# EAGLE board esp32Stack (EAGLE 7.7.0)
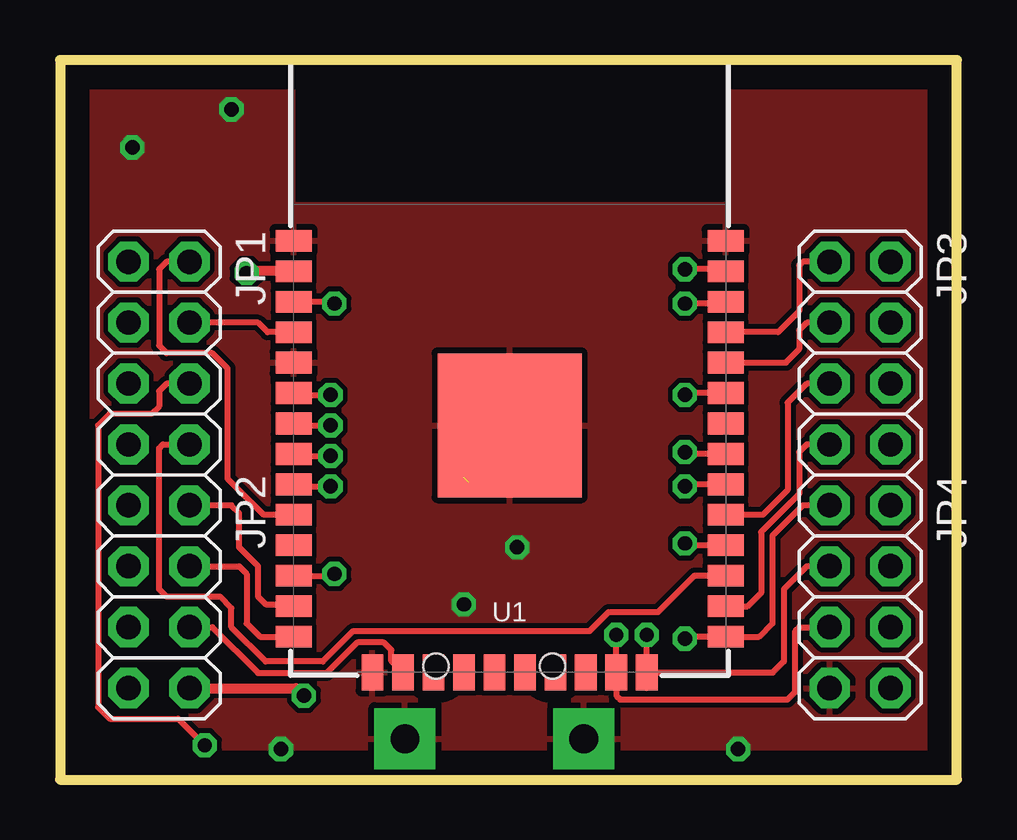
[diagram p0: board, top side]
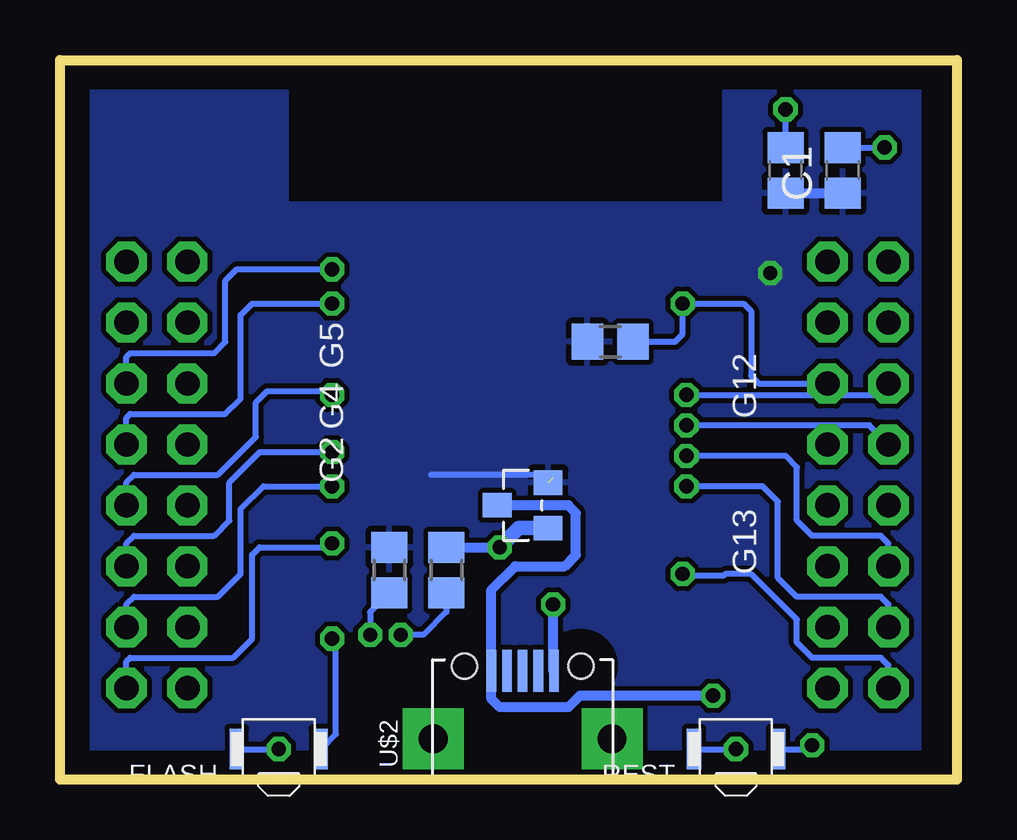
[diagram p1: board, bottom side, seen from below]

Size 37.37 x 30 mm. Coordinates in mm from the lower left corner, seen from the top.
Outline: 0,0 37.37,0 37.37,30 0,30 0,0
Copper layers (1*16): Top 0.035mm / dielectric 1.5mm / Bottom 0.035mm
Design rules "default": minimum track width 10mil, minimum drill 24mil, track to track 8mil, track to pad 8mil, pad to pad 8mil, via to via 8mil, smd to smd 8mil, copper to edge 40mil, drill to drill 8mil, minimum pad ring 10mil, minimum via ring 8mil, stop-mask expansion 4mil, vias tented up to drill 0mil, thermal gap 10mil

## Footprints (pad centres in the part's own frame; a part is rotated, then mirrored left to right if it is on the bottom)
C0805 = smd 1.3 x 1.5: 1 -0.95,0; 2 0.95,0
B3U-3000P(M) = smd 0.6 x 1.7: 1 -1.75,0; 2 1.75,0
SOT-23 = smd 1.016 x 1.2: 1 -0.95,-1.06; 2 0.95,-1.06; 3 0,1.06
2X04 = drill 1.016 pad 1.676 octagon: 1 -3.81,-1.27; 2 -3.81,1.27; 3 -1.27,-1.27; 4 -1.27,1.27; 5 1.27,-1.27; 6 1.27,1.27; 7 3.81,-1.27; 8 3.81,1.27
R0805 = smd 1.3 x 1.5: 1 -0.95,0; 2 0.95,0
ESP-WROOM-03 = smd 0.9 x 1.5: 1 7.7,9; 2 6.43,9; 3 5.16,9; 4 3.89,9; 5 2.62,9; 6 1.35,9; 7 0.08,9; 8 -1.19,9; 9 -2.46,9; 10 -3.73,9; 11 -5,9; 12 -6.27,9; 13 -7.54,9; 14 -8.81,9; 25 -8.81,-9; 26 -7.54,-9; 27 -6.27,-9; 28 -5,-9; 29 -3.73,-9; 30 -2.46,-9; 31 -1.19,-9; 32 0.08,-9; 33 1.35,-9; 34 2.62,-9; 35 3.89,-9; 36 5.16,-9; 37 6.43,-9; 38 7.7,-9 | smd 1.5 x 0.9: 15 -10.3,5.715; 16 -10.3,4.445; 17 -10.3,3.175; 18 -10.3,1.905; 19 -10.3,0.635; 20 -10.3,-0.635; 21 -10.3,-1.905; 22 -10.3,-3.175; 23 -10.3,-4.445; 24 -10.3,-5.715 | smd 6 x 6: GND 0,0
MICRO-USB = smd 0.4 x 1.75: 1 -1.3,4.525; 2 -0.65,4.525; 3 0,4.525; 4 0.65,4.525; 5 1.3,4.525 | drill 1.2 pad 2.54 square: GND1 -3.725,1.7; GND2 3.725,1.7 | hole 1.05: -2.425,4.73; 2.425,4.73

## Placement (x,y rotation side)
C1  100u  [C0805]  4.76,25.4 90 bottom
C2  10u  [C0805]  7.14,25.4 90 bottom
FLASH  SPST.B3U-3000P(M)  [B3U-3000P(M)]  28.26,1.27 180 bottom
GND  MCP1700SOT23  [SOT-23]  18.1,11.43 90 bottom
JP1  [2X04]  4.13,17.78 270 top
JP2  [2X04]  4.13,7.62 270 top
JP3  [2X04]  33.34,17.78 270 top
JP4  [2X04]  33.34,7.62 270 top
R2  10k  [R0805]  14.45,18.26 180 bottom
R3  10k  [R0805]  23.65,8.73 90 bottom
R5  10k  [R0805]  21.27,8.73 270 bottom
REST  SPST.B3U-3000P(M)  [B3U-3000P(M)]  9.21,1.27 180 bottom
U1  ESP-WROOM-03  [ESP-WROOM-03]  18.73,14.76 90 top
U$2  MICRO-USB  [MICRO-USB]  18.1,0 0 bottom

## Library data of the parts
C1 C2 = eagle-ltspice; SPICEMODEL: NONE; SPICEPREFIX: C
FLASH REST = omron
GND = MCP1700
JP1-JP4 = adafruit
R2 R3 R5 = eagle-ltspice; SPICEMODEL: NONE; SPICEPREFIX: R
U1 = esp32
U$2 = microusb (1)

## Nets
3V3: C1.1 C2.1 GND.2 R2.2 R3.2 U1.2
+5V: GND.3 JP2.8 U$2.1
ADC: JP1.4 U1.4
EN: JP1.6 R2.1 REST.1 U1.3
GND: C1.2 C2.2 FLASH.2 GND.1 JP4.7 R5.1 REST.2 U1.1 U1.5 U1.15 U1.38 U1.GND U$2.5 U$2.GND1 U$2.GND2
GPIO0: FLASH.1 JP4.1 U1.25
GPIO2: JP4.3 R3.1 U1.24
GPIO4: JP3.7 U1.26
GPIO5: JP3.5 U1.29
GPIO12: JP2.4 U1.14
GPIO13: JP2.6 U1.16
GPIO14: JP2.2 U1.13
GPIO15: JP4.5 R5.2 U1.23
GPIO16: JP1.8 U1.27
GPIO17: JP4.8 U1.28
GPIO18: JP4.6 U1.30
GPIO19: JP4.4 U1.31
GPIO21: JP4.2 U1.33
GPIO22: JP3.8 U1.36
GPIO23: JP3.6 U1.37
GPIO25: JP1.2 U1.10
GPIO27: JP2.7 U1.12
GPIO32: JP2.3 U1.8
GPIO33: JP2.5 U1.9
GPIO34: JP1.5 U1.6
GPIO35: JP1.7 U1.7
RXD: JP3.3 U1.34
TXD: JP3.1 U1.35

## Tracks (layer width: path | path; a pad name or v marks a point on that pad's centre or on a via)
3V3  (via drill 0.6)  (1 unrouted)
  Top 0.406: U1.2 7.86,21.19 v7.78,21.11
  Bottom 0.254: GND.2 17.36,12.7 21.91,12.7
  Bottom 0.406: C2.1 C1.1 | 16.83,12.59 16.72,12.59
  pour Bottom: 1.59,30.48 9.68,30.48 9.68,23.97 27.94,23.97 27.94,30 36.99,30 36.99,0 1.59,0
+5V  (via drill 0.6)
  Top 0.406: JP2.8 9.84,3.81 v10.16,3.49
  Bottom 0.406: GND.3 16.19,11.43 15.88,11.11 15.88,9.37 16.35,8.89 18.42,8.89 19.4,7.91 U$2.1 19.4,3.36 19.05,3.02 16.19,3.02 15.72,3.49 v10.16,3.49
ADC
  Top 0.254: U1.4 8.65,18.65 8.26,19.05 JP1.4
EN  (via drill 0.6)
  Top 0.254: U1.3 11.35,19.92 v11.43,19.84 | JP1.6 4.45,16.51 4.13,16.19 4.13,15.56 3.81,15.24 2.06,15.24 1.59,14.76 1.59,3.02 2.06,2.54 4.92,2.54 v6.03,1.43
  Bottom 0.254: JP1.6 8.26,16.51 8.57,16.83 8.57,19.53 8.89,19.84 v11.43,19.84 11.43,18.57 11.75,18.26 R2.1 | REST.1 6.19,1.27 v6.03,1.43
GND  (via drill 0.6)
  Bottom 0.254: C2.2 v7.14,27.94 | C1.2 v3.02,26.35 | REST.2 v9.21,1.27 | FLASH.2 v28.26,1.27
  Bottom 0.406: R5.1 v19.05,9.68 | U$2.5 16.83,4.55 v16.83,7.3
  Bottom 0.61: GND.1 18.25,10.48 v19.05,9.68
  pour Top: -2.22,30.48 9.68,30.48 9.68,23.97 27.94,23.97 27.94,30.48 37.15,30.48 37.15,0 -2.22,0
GPIO0  (via drill 0.6)
  Top 0.254: U1.25 28.18,5.95 | U1.25 29.13,5.95 29.69,6.51 29.69,10.16 30.96,11.43 JP4.1 | U1.25 26.12,5.95 v26.04,5.87
  Bottom 0.254: FLASH.1 25.88,1.9 25.88,5.71 v26.04,5.87
GPIO2  (via drill 0.6)
  Top 0.254: U1.24 24.45,3.81 | U1.24 29.71,4.46 30.16,4.92 30.16,7.94 31.12,8.89 JP4.3 | U1.24 v24.45,6.03
  Bottom 0.254: R3.1 24.45,6.99 v24.45,6.03
GPIO4
  Top 0.254: U1.26 28.65,7.22 29.21,7.78 29.21,10.32 30.8,11.91 30.8,13.65 31.12,13.97 JP3.7
GPIO5
  Top 0.254: JP3.5 31.12,16.51 30.32,15.72 30.32,12.06 29.29,11.03 U1.29
GPIO12
  Top 0.254: JP2.4 7.46,8.89 7.78,8.57 7.78,6.51 8.33,5.95 U1.14
GPIO13
  Top 0.254: JP2.6 6.35,6.35 8.26,4.45 11.11,4.45 12.38,5.71 13.49,5.71 13.81,5.4 13.81,4.94 U1.16
GPIO14
  Top 0.254: U1.13 9.65,7.3 8.57,7.3 8.26,7.62 8.26,8.89 7.46,9.68 7.46,11.11 7.14,11.43 JP2.2
GPIO15  (via drill 0.6)
  Top 0.254: JP4.5 30.8,6.35 30.64,6.19 30.64,3.65 30.32,3.33 23.34,3.33 23.18,3.49 U1.23 v23.18,6.03
  Bottom 0.254: R5.2 21.27,6.99 22.22,6.03 v23.18,6.03
GPIO16
  Top 0.254: U1.27 26.43,8.49 24.92,6.99 22.86,6.99 22.07,6.19 12.22,6.19 10.95,4.92 8.57,4.92 7.14,6.35 7.14,7.14 6.67,7.62 4.45,7.62 4.13,7.94 4.13,13.81 4.29,13.97 JP1.8
GPIO17  (via drill 0.6)
  Top 0.254: U1.28 26.11,9.76 v26.04,9.84
  Bottom 0.254: JP4.8 34.61,4.92 34.45,5.08 30.16,5.08 29.37,5.87 29.37,9.37 29.05,9.68 26.19,9.68 v26.04,9.84
GPIO18  (via drill 0.6)
  Top 0.254: U1.30 26.12,12.3 v26.04,12.22
  Bottom 0.254: JP4.6 34.61,7.3 34.29,7.62 30.8,7.62 29.84,8.57 29.84,11.27 28.89,12.22 v26.04,12.22
GPIO19  (via drill 0.6)
  Top 0.254: U1.31 26.11,13.57 v26.04,13.65
  Bottom 0.254: JP4.4 34.61,9.84 34.29,10.16 30.96,10.16 30.32,10.79 30.32,12.38 29.05,13.65 v26.04,13.65
GPIO21  (via drill 0.6)
  Top 0.254: U1.33 26.12,16.11 v26.04,16.03
  Bottom 0.254: JP4.2 34.61,12.38 34.29,12.7 30.8,12.7 29.21,14.29 29.21,15.72 28.73,16.19 26.19,16.19 v26.04,16.03
GPIO22  (via drill 0.6)
  Top 0.254: U1.36 27.65,19.84 v26.04,19.84
  Bottom 0.254: JP3.8 34.61,15.08 34.45,15.24 30.48,15.24 29.84,15.88 29.84,19.37 29.37,19.84 v26.04,19.84
GPIO23  (via drill 0.6)
  Top 0.254: U1.37 27.65,21.27 v26.04,21.27
  Bottom 0.254: JP3.6 34.61,17.62 34.45,17.78 30.96,17.78 30.48,18.26 30.48,20.8 30,21.27 v26.04,21.27
GPIO25
  Top 0.254: 9.81,11.11 U1.10 8.49,11.03 6.98,12.54 6.98,17.14 6.35,17.78 4.45,17.78 4.13,18.1 4.13,21.27 4.45,21.59 JP1.2
GPIO27  (via drill 0.6)
  Top 0.254: U1.12 11.35,8.49 arc90 v11.43,8.57
  Bottom 0.254: 11.27,8.41 v11.43,8.57 11.35,8.49 U1.12 9.65,8.57 8.57,8.57 6.67,6.67 6.67,5.71 6.03,5.08 3.18,5.08 2.86,4.76 JP2.7
GPIO32  (via drill 0.6)
  Top 0.254: U1.8 9.81,13.49 v11.27,13.49
  Bottom 0.254: 11.11,13.65 v11.27,13.49 7.14,13.49 6.67,13.02 6.67,10.79 6.03,10.16 3.18,10.16 2.86,9.84 JP2.3
GPIO33  (via drill 0.6)
  Top 0.254: U1.9 9.81,12.22 v11.27,12.22
  Bottom 0.254: JP2.5 2.86,7.3 3.18,7.62 6.67,7.62 7.46,8.41 7.46,11.59 8.1,12.22 v11.27,12.22
GPIO34  (via drill 0.6)
  Top 0.254: U1.6 9.81,16.03 v11.27,16.03
  Bottom 0.254: v11.27,16.03 3.33,16.03 JP1.5
GPIO35  (via drill 0.6)
  Top 0.254: U1.7 9.81,14.76 v11.27,14.76
  Bottom 0.254: JP1.7 3.65,14.76 v11.27,14.76
RXD
  Top 0.254: U1.34 30.24,17.38 30.8,17.94 30.8,18.73 31.12,19.05 JP3.3
TXD
  Top 0.254: JP3.1 30.96,21.59 30.8,21.43 30.8,19.53 29.93,18.65 U1.35

## Text on the board
bNames: G12 | G5 | G4 | G2 | G13